# EAGLE board current sensor (1) (EAGLE 9.3.0)
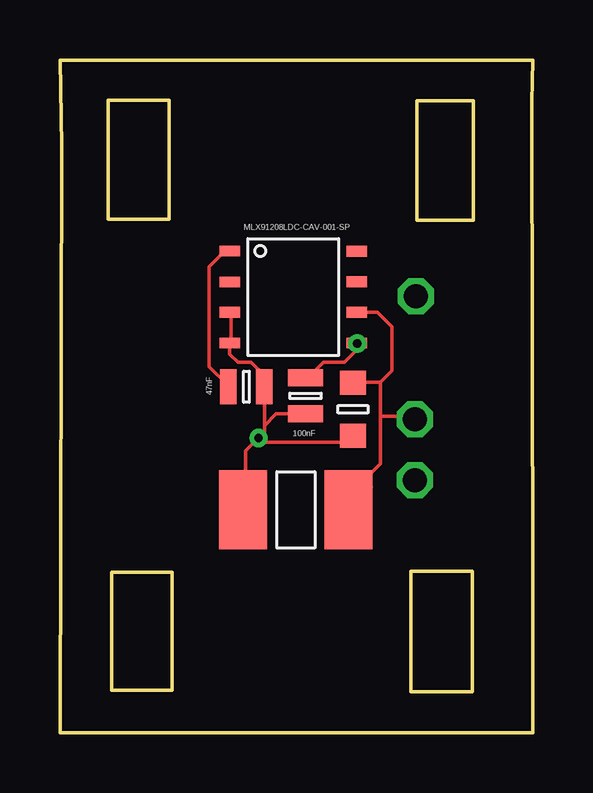
[diagram p0: board, top side]
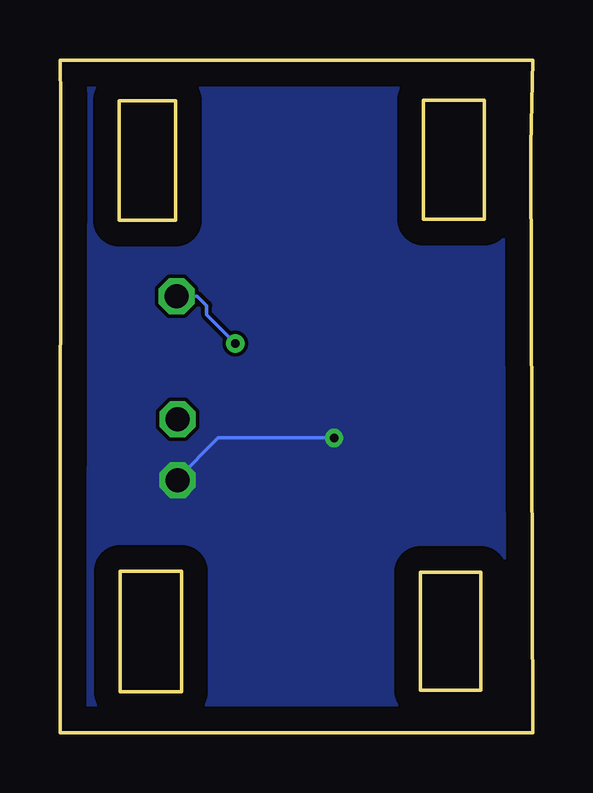
[diagram p1: board, bottom side, seen from below]

Size 19.71 x 28.04 mm. Coordinates in mm from the lower left corner, seen from the top.
Outline: 0,28.04 19.71,28.04 19.69,26.29 19.71,6.05 19.71,0 0,0 0.08,24.46 0,28.04
Copper layers (1*16): Top 0.035mm / dielectric 1.5mm / Bottom 0.035mm
Design rules "default": minimum track width 6mil, minimum drill 0.35mm, track to track 6mil, track to pad 6mil, pad to pad 6mil, via to via 6mil, smd to smd 6mil, copper to edge 40mil, drill to drill 6mil, minimum pad ring 10mil, minimum via ring 8mil, stop-mask expansion 4mil, vias tented up to drill 0mil, thermal gap 10mil

## Footprints (pad centres in the part's own frame; a part is rotated, then mirrored left to right if it is on the bottom)
MLX91208LDC-CAV-001-SP = smd 0.45 x 0.85: NC -0.63,-2.65; NC1 -1.91,2.65; NC2 -0.64,2.65; OUT 0.63,2.65; TEST 1.91,-2.65; VDD 1.91,2.65; VDEC -1.92,-2.65; VSS 0.63,-2.65
AS0805KKX7R9BB104 = smd 0.7 x 1.45: P$1 -0.75,0; P$2 0.75,0
GRM2195C1H103FA01D = smd 1 x 1.1: P$1 -1.1,0; P$2 1.1,0
C0805C473K8RACTU = smd 0.7 x 1.45: P$1 -0.75,0; P$2 0.75,0
352220KFT = smd 2 x 3.3: P$1 2.2,0; P$2 -2.2,0

## Placement (x,y rotation side)
E$1  [MLX91208LDC-CAV-001-SP]  9.73,18.16 270 top
E$2  [AS0805KKX7R9BB104]  10.24,14.05 270 top
E$3  [GRM2195C1H103FA01D]  12.22,13.49 270 top
E$6  [C0805C473K8RACTU]  7.77,14.43 180 top
E$8  [352220KFT]  9.83,9.3 0 top

## Library data of the parts
E$1-E$3 E$6 E$8 = Library_Capstone

## Nets
S$1: E$1.TEST E$1.VSS E$2.P$2 E$3.P$2 E$6.P$1 E$8.P$2
S$2: E$1.VDEC E$6.P$2
S$3: E$1.VDD E$2.P$1
S$4: E$1.OUT E$3.P$1 E$8.P$1

## Tracks (layer width: path | path; a pad name or v marks a point on that pad's centre or on a via)
S$1  (via drill 0.35, 1)
  Top 0.152: 10.34,13.28 E$2.P$2 | E$1.TEST 7.14,16.33 7.14,17.4 E$1.VSS | 7.14,16.1 7.14,16.18 E$1.TEST | E$2.P$2 10.19,13.44 9.58,13.44 E$2.P$2 | 8.66,14.35 E$6.P$1 | E$1.TEST 7.08,15.78 7.42,15.44 7.98,15.44 8.52,14.9 E$6.P$1 | E$6.P$1 8.52,12.8 | 8.52,12.8 8.52,12.54 v8.28,12.29 | v8.28,12.29 7.75,11.76 7.75,9.59 E$8.P$2 7.63,10.25 | E$2.P$2 9.02,13.3 8.52,12.8 | E$3.P$2 11.95,12.12 8.46,12.12 v8.28,12.29 | v8.28,12.29 8.38,12.29
  Bottom 0.152: v8.28,12.29 13.11,12.29 14.81,10.59 v14.81,10.54
  pour Bottom: 0.58,27.76 19.18,27.76 19.18,0.71 0.58,0.71
S$2
  Top 0.152: E$1.VDEC 6.87,20.08 6.22,19.43 6.22,15.27 6.99,14.5 E$6.P$2
S$3  (via drill 0.35, 1)
  Top 0.152: E$2.P$1 10.35,14.8 11,15.44 11.86,15.44 12.38,15.96 E$1.VDD v12.4,16.23
  Bottom 0.152: v12.4,16.23 13.59,17.42 13.59,17.8 13.98,18.19 v14.84,18.19
S$4  (via drill 1)
  Top 0.152: 12.03,9.33 E$8.P$1 12.25,9.52 | 12.25,9.52 13,10.26 | 13.36,14.61 12.24,14.61 E$3.P$1 | 13.36,14.61 13.36,13.21 | 13.36,13.21 13.36,11.23 12.25,10.12 12.25,9.52 | E$1.OUT 13.24,17.53 13.84,16.93 13.84,15.1 13.36,14.61 | v14.81,13.08 14.68,13.21 13.36,13.21

## Text on the board
Document: Vsupply | Vout | gnd